# EAGLE board Gate to Trig Converter PANEL V1 (EAGLE 7.7.0)
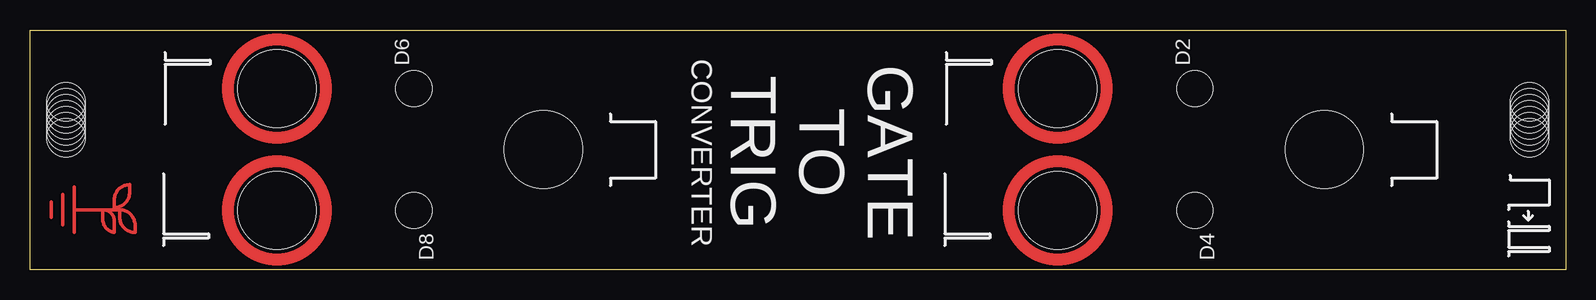
[diagram p0: board, top side]
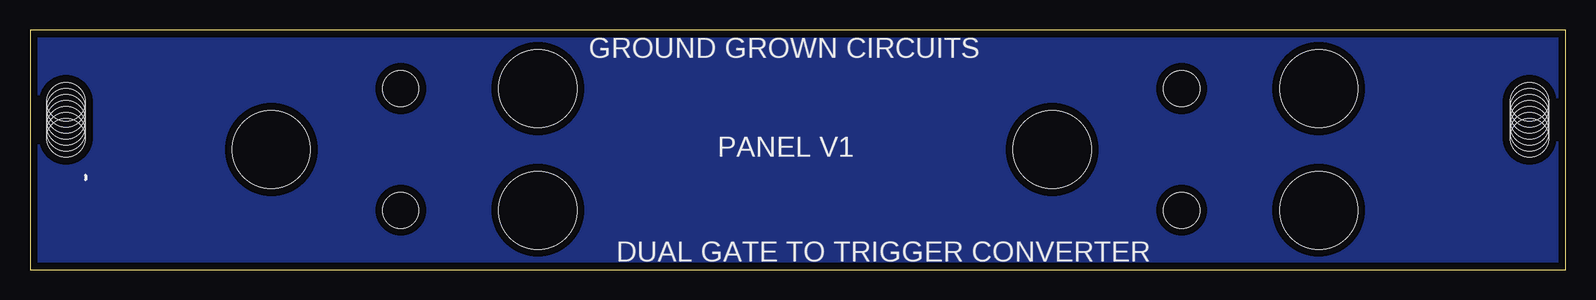
[diagram p1: board, bottom side, seen from below]

Size 128 x 20 mm. Coordinates in mm from the lower left corner, seen from the top.
Outline: 0,0 0,20 128,20 128,0 0,0
Copper layers (1*16): Top 0.035mm / dielectric 1.5mm / Bottom 0.035mm
Design rules "SparkFun": minimum track width 8mil, minimum drill 20mil, track to track 8mil, track to pad 8mil, pad to pad 8mil, via to via 8mil, smd to smd 8mil, copper to edge 8mil, drill to drill 8mil, minimum pad ring 12mil, minimum via ring 10mil, stop-mask expansion 4mil, vias tented up to drill 20mil, thermal gap 10mil

## Footprints (pad centres in the part's own frame; a part is rotated, then mirrored left to right if it is on the bottom)
LED_3MM_DRILL = hole 3: 0,0
MOUNT_DRILL = hole 3.2: 3,9; 3,8.5; 3,8; 3,7.5; 3,7; 3,6.5; 3,6
JACK_DRILL_COPPER_EXS = hole 6.5: 0,0
JACK_DRILL = hole 6.5: 0,0

## Placement (x,y rotation side)
D2  [LED_3MM_DRILL]  97.09,15.11 90 top
D4  [LED_3MM_DRILL]  97.09,4.95 270 top
D6  [LED_3MM_DRILL]  32.01,15.11 90 top
D8  [LED_3MM_DRILL]  32.01,4.95 270 top
E$1  [MOUNT_DRILL]  128,20 180 top
E$2  [MOUNT_DRILL]  0,20 180 bottom
E$3  [LOGO_SMALL_COPPER]  3.75,5 270 top
FOUT1  [JACK_DRILL_COPPER_EXS]  85.66,4.95 270 top
FOUT2  [JACK_DRILL_COPPER_EXS]  20.57,4.95 270 top
IN1  [JACK_DRILL]  107.89,10.03 90 top
IN2  [JACK_DRILL]  42.8,10.03 270 top
ROUT1  [JACK_DRILL_COPPER_EXS]  85.66,15.11 270 top
ROUT2  [JACK_DRILL_COPPER_EXS]  20.57,15.11 270 top

## Library data of the parts
D2 D4 D6 D8 E$1-E$3 FOUT1 FOUT2 IN1 IN2 ROUT1 ROUT2 = GroundGrownCircuits

## Tracks (layer width: path | path; a pad name or v marks a point on that pad's centre or on a via)
S$1
  pour Bottom (isolate 0.61): 0,0 0,20 128,20 128,0

## Text on the board
tPlace: CONVERTER | GATE / TO / TRIG
bPlace: GROUND GROWN CIRCUITS | PANEL V1 | DUAL GATE TO TRIGGER CONVERTER